# EAGLE board GAGAN_payload_V2 (EAGLE 9.3.2)
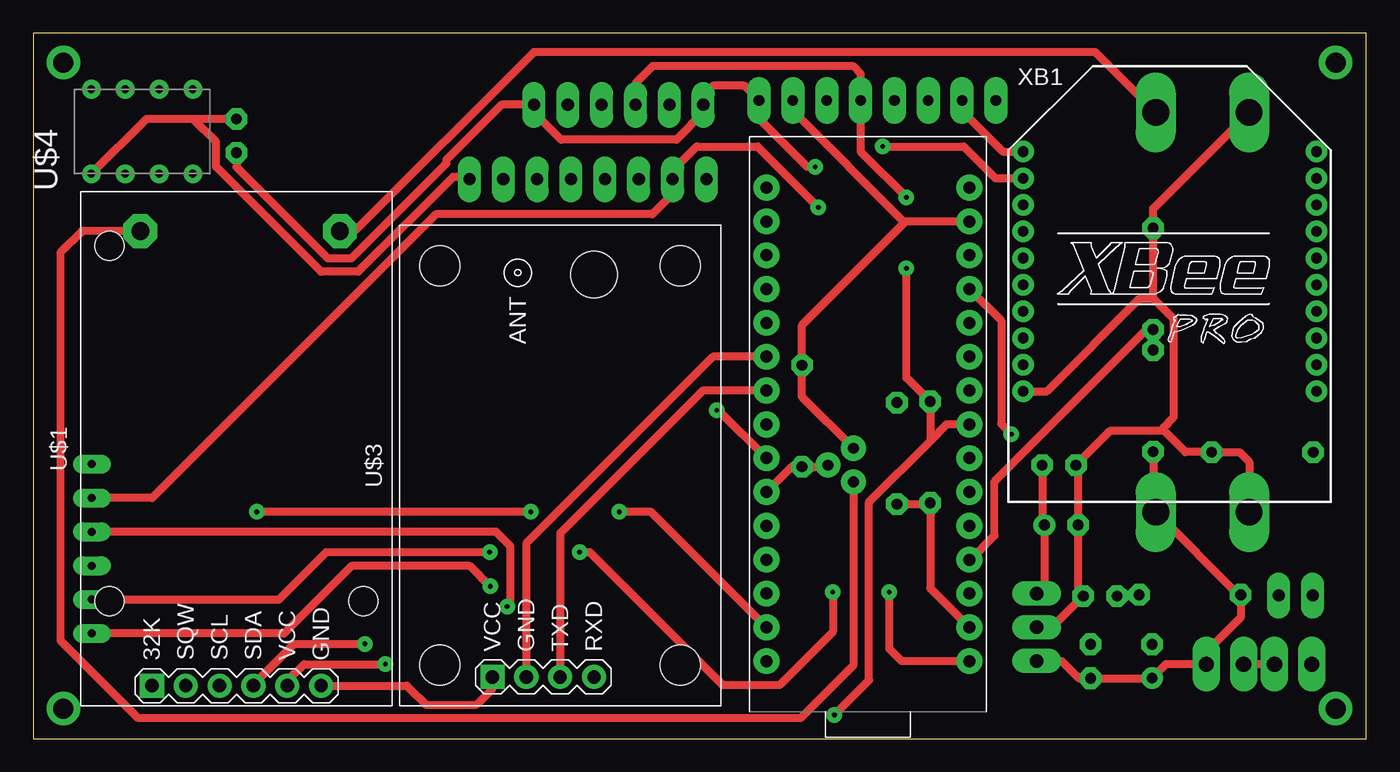
[diagram p0: board, top side]
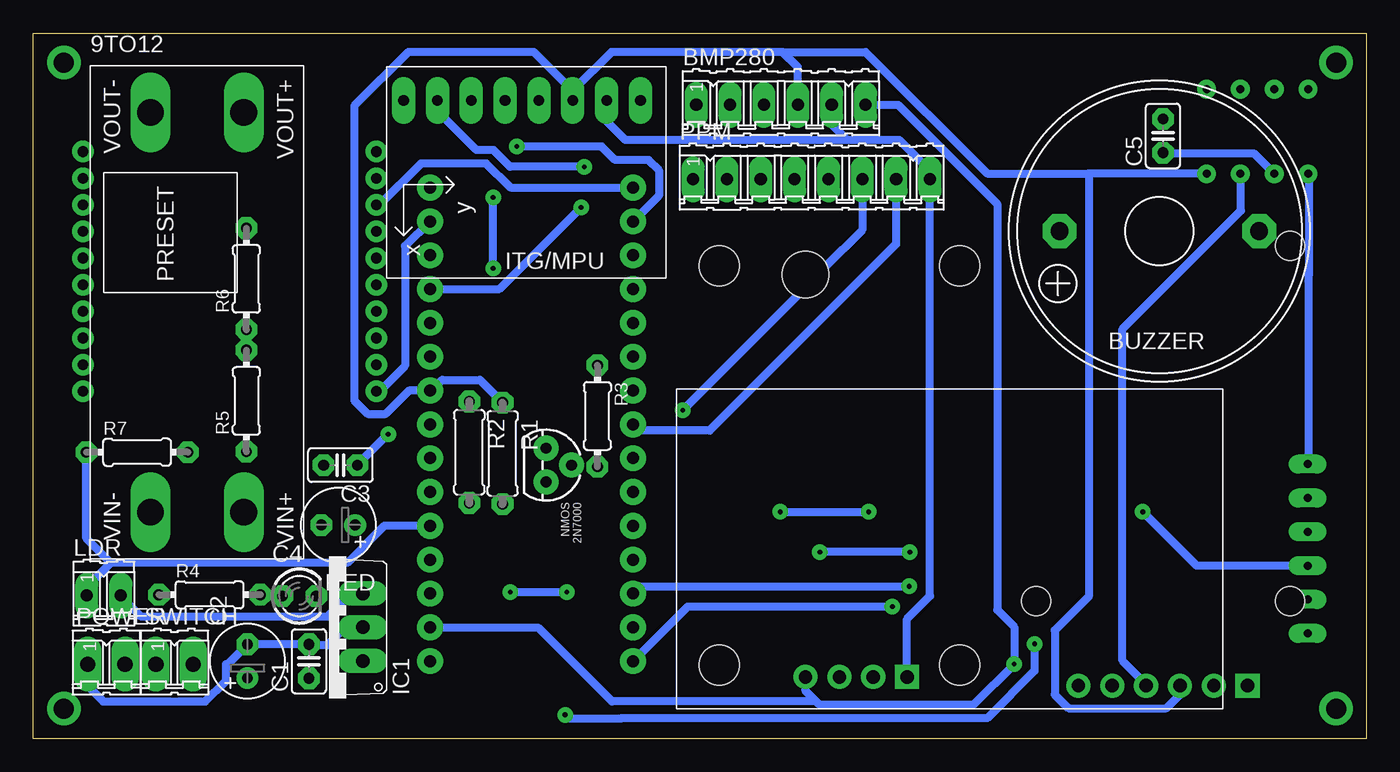
[diagram p1: board, bottom side, seen from below]

Size 100.04 x 52.95 mm. Coordinates in mm from the lower left corner, seen from the top.
Outline: 0,0 100.04,0 100.04,52.95 0,52.95 0,0
Copper layers (1*16): Top 0.035mm / dielectric 1.5mm / Bottom 0.035mm
Design rules "default *": minimum track width 6mil, minimum drill 0.35mm, track to track 16mil, track to pad 16mil, pad to pad 16mil, via to via 16mil, smd to smd 16mil, copper to edge 40mil, drill to drill 6mil, minimum pad ring 16mil, minimum via ring 16mil, stop-mask expansion 4mil, vias tented up to drill 0mil, thermal gap 10mil
Net classes: 0 default: width 0.61 mm; 1 power: width 0.61 mm

## Footprints (pad centres in the part's own frame; a part is rotated, then mirrored left to right if it is on the bottom)
BREAKOUTS_MT3608_BOB = drill 2 pad 3 long: VIN+ 33.5,-4.5; VIN- 33.5,-11.5; VOUT+ 3.5,-4.5; VOUT- 3.5,-11.5
06P = drill 0.914 long: 1 -6.35,0; 2 -3.81,0; 3 -1.27,0; 4 1.27,0; 5 3.81,0; 6 6.35,0
C025-025X050 = drill 0.813 octagon: 1 -1.27,0; 2 1.27,0
E2,5-6 = drill 0.813 pad 1.6: + -1.27,0 | drill 0.813 pad 1.6 octagon: - 1.27,0
TO220V = drill 1.016 long: 1 -2.54,-2.54; 2 0,-2.54; 3 2.54,-2.54
02P = drill 0.914 long: 1 -1.27,0; 2 1.27,0
ARDUINO_NANO_30PIN = drill 0.9 pad 1.93: 3V3 16.51,6.35; +5V 16.51,31.75; A0 16.51,11.43; A1 16.51,13.97; A2 16.51,16.51; A3 16.51,19.05; A4 16.51,21.59; A5 16.51,24.13; A6 16.51,26.67; A7 16.51,29.21; AREF 16.51,8.89; D0/RX 1.27,36.83; D1/TX 1.27,39.37; D2 1.27,29.21; D3 1.27,26.67; D4 1.27,24.13; D5 1.27,21.59; D6 1.27,19.05; D7 1.27,16.51; D8 1.27,13.97; D9 1.27,11.43; D10 1.27,8.89; D11 1.27,6.35; D12 1.27,3.81; D13 16.51,3.81; GND(1) 1.27,31.75; GND(2) 16.51,36.83; RST(1) 1.27,34.29; RST(2) 16.51,34.29; VIN 16.51,39.37
CEDT_JANUARY_2015_V5_02P = drill 1.143 long: 1 -1.397,0; 2 1.397,0
08P = drill 0.914 long: 1 -8.89,0; 2 -6.35,0; 3 -3.81,0; 4 -1.27,0; 5 1.27,0; 6 3.81,0; 7 6.35,0; 8 8.89,0
SPARKFUN-DISCRETESEMI_TO-92 = drill 0.813 pad 1.88: 1 -1.27,0; 2 0,1.905; 3 1.27,0
0207/7 = drill 0.813 octagon: 1 -3.81,0; 2 3.81,0
0204/7 = drill 0.813 octagon: 1 -3.81,0; 2 3.81,0
LED3MM = drill 0.813 octagon: A -1.27,0; K 1.27,0
BUZZER_EB2209A = drill 1.321 pad 2.54 octagon: + 7.493,0; - -7.493,0
02P' = drill 1.143 long: 1 -1.397,0; 2 1.397,0
GY-521 = drill 0.8 pad 1.778 long: ADO -8.89,-6.35; GND -8.89,6.35; INT -8.89,-8.89; SCL -8.89,3.81; SDA -8.89,1.27; VCC -8.89,8.89; XCL -8.89,-3.81; XDA -8.89,-1.27
RTC-DS3231-AT24C32 = drill 1 square: J1.1 -17.78,6.35 | drill 1: J1.2 -17.78,3.81; J1.3 -17.78,1.27; J1.4 -17.78,-1.27; J1.5 -17.78,-3.81; J1.6 -17.78,-6.35 | hole 2.2: -11.43,-9.525; -11.43,9.525; 15.24,9.525
GPS-RECEIVER-NEO6M = drill 1 square: 1 -15.875,5.08 | drill 1: 2 -15.875,2.54; 3 -15.875,0; 4 -15.875,-2.54 | hole 3: -14.986,9.017; -14.986,-9.017; 14.986,-9.017; 14.986,9.017 | hole 3.5: 14.351,-2.54
MS4525DO = drill 0.6: P$1 -6.35,8.89; P$2 -6.35,6.35; P$3 -6.35,3.81; P$4 -6.35,1.27; P$5 0,8.89; P$6 0,6.35; P$7 0,3.81; P$8 0,1.27
M0SDCARDMODULE = drill 0.6 long: CS -6.35,6.35; GND -6.35,-6.35; MISO -6.35,-1.27; MOSI -6.35,1.27; SCK -6.35,3.81; VCC -6.35,-3.81
XBEE-PRO = drill 0.8 pad 1.27: 1 -11,9; 2 -11,7; 3 -11,5; 4 -11,3; 5 -11,1; 6 -11,-1; 7 -11,-3; 8 -11,-5; 9 -11,-7; 10 -11,-9; 11 11,-9; 12 11,-7; 13 11,-5; 14 11,-3; 15 11,-1; 16 11,1; 17 11,3; 18 11,5; 19 11,7; 20 11,9

## Placement (x,y rotation side)
9TO12  BREAKOUTS_MT3608_BOB  [BREAKOUTS_MT3608_BOB]  79.75,50.5 270 bottom
BMP280  [06P]  43.93,47.58 0 bottom
C1  0.1u  [C025-025X050]  79.35,5.8 90 bottom
C2  10u  [E2,5-6]  83.97,5.81 90 bottom
C3  10u  [C025-025X050]  76.99,20.53 180 bottom
C4  0.1u  [E2,5-6]  77.15,16.03 180 bottom
C5  0.1u  [C025-025X050]  15.25,45.25 90 bottom
IC1  7805TV  [TO220V]  77.84,8.36 90 bottom
LDR  [02P]  94.75,10.75 0 bottom
MOD1  ARDUINO(NANO_3.0)  [ARDUINO_NANO_30PIN]  53.75,2 0 top
POWER  [CEDT_JANUARY_2015_V5_02P]  94.55,5.58 0 bottom
PPM  [08P]  41.63,41.99 0 bottom
Q1  SPARKFUN-DISCRETESEMI_MOSFET-NCHANNEL2N7000  [SPARKFUN-DISCRETESEMI_TO-92]  61.55,20.53 270 bottom
R1  [0207/7]  64.82,21.41 270 bottom
R2  [0207/7]  67.32,21.5 270 bottom
R3  1K  [0204/7]  57.7,24.22 270 bottom
R4  1k  [0204/7]  86.81,10.8 0 bottom
R5  3.3k  [0204/7]  84.05,25.35 90 bottom
R6  4.7k  [0204/7]  84.05,34.51 90 bottom
R7  1K  [0204/7]  92.25,21.5 0 bottom
RED  red  [LED3MM]  80.07,10.7 0 bottom
SG1  BUZZER_EB2209A  [BUZZER_EB2209A]  15.52,38.1 180 bottom
SWITCH  [02P']  89.44,5.58 0 bottom
U1  GY-521MPU6050  [GY-521]  63.36,39.03 270 bottom
U$1  RTC-DS3231-AT24C32  [RTC-DS3231-AT24C32]  15.25,21.75 90 top
U$3  GPS-RECEIVER-NEO6M  [GPS-RECEIVER-NEO6M]  39.54,20.5 90 top
U$4  [MS4525DO]  13.25,48.75 90 top
U$5  SDCARD  [M0SDCARDMODULE]  10.75,14.25 180 bottom
XB1  XBEE-PRO  [XBEE-PRO]  85.3,35.07 0 top

## Library data of the parts
9TO12 POWER Q1 = Cansat2019_3279_Container_v01
BMP280 LDR PPM = con-amp-quick; OC_FARNELL: unknown; OC_NEWARK: unknown
C1 C3 C5 = resistor
C2 C4 R3-R7 = rcl
IC1 = linear
MOD1 = Arduino_Nano_3
R1 R2 = rcl; SPICEPREFIX: R
RED SWITCH = CEDT_JANUARY_2015_v5
SG1 = Cansat2019_3279_Container_v01; OC_FARNELL: unknown; OC_NEWARK: unknown
U1 = gy-521
U$1 = diy-modules
U$3 = diy-modules_modded_gps
U$4 = MS4525
U$5 = mylib
XB1 = maxstream; MPN: XBP24-AWI-001; OC_FARNELL: 1337916; OC_NEWARK: 42M2667

## Nets
3.3V [power]: BMP280.1 BMP280.6 C5.1 MOD1.3V3 R1.2 R2.2 U1.ADO U1.VCC U$1.J1.5 U$3.4 U$4.P$2 XB1.1
5V [power]: C3.1 C4.+ IC1.3 LDR.2 MOD1.+5V PPM.2 U$5.VCC
9V [power]: 9TO12.VIN+ C1.1 C2.+ IC1.1 R4.1 R5.1 SWITCH.2
12V [power]: 9TO12.VOUT+ SG1.+
AS_INT: U$4.P$5
BUZZER: MOD1.D7 Q1.2 R3.2
CSSDCARD: MOD1.D10 U$5.CS
GND [power]: 9TO12.VIN- 9TO12.VOUT- BMP280.5 C1.2 C2.- C3.2 C4.- C5.2 IC1.2 MOD1.GND(2) POWER.1 PPM.8 Q1.1 R3.1 R6.2 R7.2 RED.K U1.GND U$1.J1.6 U$3.1 U$4.P$1 U$5.GND XB1.10
LDR_VOL: LDR.1 MOD1.A1 R7.1
MISO: MOD1.D12 U$5.MISO
MOSI: MOD1.D11 U$5.MOSI
N$1 [power]: POWER.2 SWITCH.1
N$2: R4.2 RED.A
N$3 [power]: Q1.3 SG1.-
RXBEE: MOD1.D0/RX XB1.2
RXGPS: MOD1.D3 U$3.2
RXPPM: MOD1.D6 PPM.6
SCK: MOD1.D13 U$5.SCK
SCL: BMP280.4 MOD1.A5 R1.1 U1.SCL U$1.J1.3 U$4.P$4
SDA: BMP280.3 MOD1.A4 R2.1 U1.SDA U$1.J1.4 U$4.P$3
TXBEE: MOD1.D1/TX XB1.3
TXGPS: MOD1.D4 U$3.3
TXPPM: MOD1.D5 PPM.7
VOL_MES: MOD1.A0 R5.2 R6.1

## Tracks (layer width: path | path; a pad name or v marks a point on that pad's centre or on a via)
3.3V  (via drill 0.35)
  Top 0.61: v26.42,5.59 20.33,5.59 19.06,4.32 U$1.J1.5 | XB1.1 72.77,44.07 69.71,47.13 U1.ADO | R1.2 67.23,17.6 R2.2 67.32,11.29 MOD1.3V3 | v58.67,42.93 58.07,42.93 54.47,46.53 U1.VCC 53.39,49 51,49 50.28,48.28 BMP280.1 50.28,46.98 48.26,44.96 39.62,44.96 37.58,47 BMP280.6 35.13,47.58 30.99,43.43 30.99,43.18 23.88,36.07 22.1,36.07 15.25,42.92 C5.1
  Bottom 0.61: v58.67,42.93 64.26,42.93 65.53,44.2 66.8,44.2 69.71,47.1 U1.ADO | MOD1.3V3 62.17,8.35 56.61,2.79 41.29,2.79 | U$3.4 42.08,3.58 41.29,2.79 | 41.29,2.79 41.04,2.54 29.46,2.54 v26.42,5.59 26.42,8.38 27.69,9.65 27.69,40.13 35.13,47.58 BMP280.6 | U$4.P$2 8.44,43.94 15.24,43.94 15.25,43.95 C5.1
5V  (via drill 0.35)
  Top 0.61: v73.41,22.86 72.64,23.62 72.64,31.37 MOD1.+5V | U$5.VCC 8.92,18.06 30.23,39.37 46.47,39.37 48,40.9 48,41.97 PPM.2 48.01,42.02 48.01,42.67 49.78,44.45 54.36,44.45 v58.93,39.88 | IC1.3 75.88,11.48 C4.+ 75.72,16.19 C3.1
  Bottom 0.61: LDR.2 93.48,10.69 91.94,9.14 77.98,9.14 76.22,10.9 IC1.3 | MOD1.+5V 65.06,33.75 v58.93,39.88 | C3.1 75.72,20.55 v73.41,22.86
9V
  Top 0.61: IC1.1 77.18,5.82 78.47,4.53 C1.1 C2.+ 85.01,5.58 SWITCH.2 88.04,6.51 90.62,9.09 R4.1 90.45,10.8 9TO12.VIN+ 84.05,17.2 R5.1
12V
  Top 0.61: SG1.+ 24.13,38.1 37.58,51.55 79.7,51.55 9TO12.VOUT+
BUZZER
  Top 0.61: MOD1.D7 56.92,20.41 R3.2 59.52,20.41 Q1.2
CSSDCARD  (via drill 0.35)
  Top 0.61: U$5.CS 18.82,7.9 23.88,12.95 32.77,12.95 v34.29,11.43
  Bottom 0.61: v34.29,11.43 54.61,11.43 55.02,11.02 MOD1.D10
GND
  Top 0.61: 84.84,23.11 80.84,23.11 C3.2 78.42,20.37 C4.- 78.42,11.08 RED.K 76.46,8.36 IC1.2 | 84.07,33.02 85.6,31.5 85.6,24.13 84.84,23.37 84.84,23.11 | U$3.1 34.46,3.74 33.26,2.54 29.46,2.54 28.03,3.97 U$1.J1.6 | 65.28,38.61 65.28,38.86 57.01,47.13 U1.GND | PPM.8 32.57,42.16 31.49,42.16 24.38,35.05 21.59,35.05 13.72,42.93 13.72,44.8 12,46.52 | 84.07,33.02 84.05,33.04 R6.2 84.05,39.8 9TO12.VOUT- | 65.28,38.61 57.7,31.03 R3.1 57.7,25.61 57.74,25.61 Q1.1 | MOD1.GND(2) 65.5,38.83 65.28,38.61 | 9TO12.VIN- 91.25,20.75 90.5,21.5 R7.2 86.45,21.5 84.84,23.11 | XB1.10 76.07,26.07 83.02,33.02 84.07,33.02 | C5.2 12,46.52 | 12,46.52 8.48,46.52 U$4.P$1
  Bottom 0.61: 38.96,44.96 55.61,44.96 57.01,46.35 U1.GND | BMP280.5 40.12,46.12 38.96,44.96 | 38.96,44.96 35.05,44.96 32.74,42.65 PPM.8 32.74,10.7 34.46,8.98 U$3.1 | POWER.1 95.95,3.95 94.79,2.79 87.12,2.79 85.6,4.32 85.6,5.58 85.47,5.58 C2.- C1.2 79.28,7 78,7 76.64,8.36 IC1.2 | XB1.10 74.05,26.07 72.14,27.98 72.14,37 72.09,37 MOD1.GND(2) | U$4.P$1 4.3,42.34 4.3,34.81 4.32,34.8 4.32,20.68 U$5.GND
LDR_VOL
  Bottom 0.61: 94.23,13.21 76.45,13.21 73.69,15.97 MOD1.A1 | 94.23,13.21 96.01,11.43 LDR.1 | 94.23,13.21 96.06,15.03 R7.1
MISO  (via drill 0.35)
  Top 0.61: v35.56,9.91 35.82,10.16 35.82,14.44 34.74,15.52 U$5.MISO
  Bottom 0.61: v35.56,9.91 50.92,9.91 MOD1.D12
MOSI  (via drill 0.35)
  Top 0.61: v37.34,17.02 v16.76,17.02 | MOD1.D11 46.35,17.02 v43.98,17.02
  Bottom 0.61: v43.98,17.02 v37.34,17.02 | U$5.MOSI 12.73,12.98 v16.76,17.02
N$1
  Top 0.61: POWER.2 SWITCH.1
N$2
  Top 0.61: R4.2 82.87,10.67 81.37,10.67 RED.A
N$3
  Top 0.61: SG1.- 3.66,38.1 2.03,36.47 2.03,7.37 7.87,1.52 57.59,1.52 61.55,5.48 Q1.3
N$4  (via drill 1.5)
  other vias: 2.25,50.75
N$5  (via drill 1.5)
  other vias: 2.25,2.25
N$6  (via drill 1.5)
  other vias: 97.75,50.75
N$7  (via drill 1.5)
  other vias: 97.75,2.25
RXBEE  (via drill 0.35)
  Top 0.61: v63.75,44.45 69.85,44.45 72.23,42.07 XB1.2
  Bottom 0.61: v63.75,44.45 57.38,44.45 56.36,43.43 53.86,43.43 53.09,42.66 53.09,40.76 MOD1.D0/RX
RXGPS
  Top 0.61: U$3.2 37,14.64 51.03,28.67 MOD1.D3
RXPPM  (via drill 0.35)
  Top 0.61: MOD1.D6 51.43,24.64 v51.3,24.64
  Bottom 0.61: v51.3,24.64 40.72,35.23 40.72,35.28 37.82,38.18 PPM.6
SCK  (via drill 0.35)
  Top 0.61: MOD1.D13 65.19,5.81 64.25,6.75 v64.25,11 | v60,11 60,8 56,4 51.75,4 41.75,14 v41,14 | U$5.SCK 18.44,10.44 22,14 v34.25,14
  Bottom 0.61: v64.25,11 v60,11 | v34.25,14 v41,14
SCL
  Bottom 0.61: R1.1 66.52,26.92 69.34,26.92 70.14,26.13 MOD1.A5 71.84,26.13 73.59,24.38 74.93,24.38 75.95,25.4 75.95,47.5 71.9,51.55 62.47,51.55 59.69,48.77 59.69,48.06 U1.SCL 59.55,48.65 56.66,51.55 43.8,51.55 | 20.83,42.42 28.45,42.42 37.58,51.55 43.8,51.55 | 20.83,42.42 20.83,10.67 23.37,8.13 23.37,3.3 22.35,2.29 15,2.29 13.98,3.3 U$1.J1.3 | BMP280.4 42.66,50.41 43.8,51.55 | U$4.P$4 12,42.42 20.83,42.42
SDA  (via drill 0.35)
  Top 0.61: 67.32,22.36 62.73,17.78 62.73,4.39 v60.13,1.78 | v24.89,7.11 19.56,7.11 16.52,4.07 U$1.J1.4 | v65.53,40.64 62.09,44.08 U1.SDA 62.09,49.91 61.5,50.5 46.5,50.5 45.2,49.2 BMP280.3 | 67.32,22.36 R2.1 65.53,27.1 v65.53,35.31 | MOD1.A4 68.55,23.59 67.32,22.36
  Bottom 0.61: v65.53,35.31 v65.53,40.64 | U$1.J1.4 16.52,4.07 18.29,5.84 18.29,30.73 9.4,39.62 9.4,42.36 U$4.P$3 | v60.13,1.78 59.88,1.53 55.87,1.53 55.86,1.52 28.45,1.52 24.89,5.08 v24.89,7.11
TXBEE
  Bottom 0.61: XB1.3 74.05,40.07 70.94,43.18 66.04,43.18 64.23,41.37 MOD1.D1/TX
TXGPS
  Top 0.61: U$3.3 39.54,15.41 50.26,26.13 MOD1.D4
TXPPM
  Bottom 0.61: MOD1.D5 54.55,23.12 49.27,23.12 35.28,37.11 PPM.7
VOL_MES
  Top 0.61: R5.2 R6.1 83.53,30.7 72.14,19.3 72.14,15.24 70.33,13.43 MOD1.A0